# EAGLE board magspoof (EAGLE 6.3)
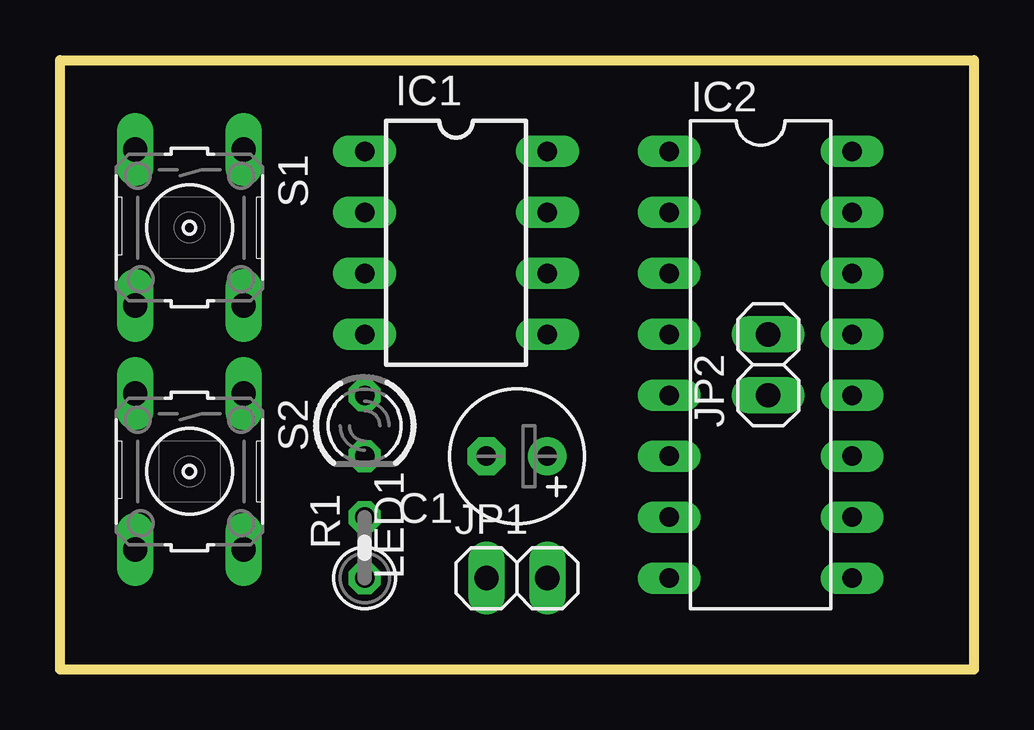
[diagram p0: board, top side]
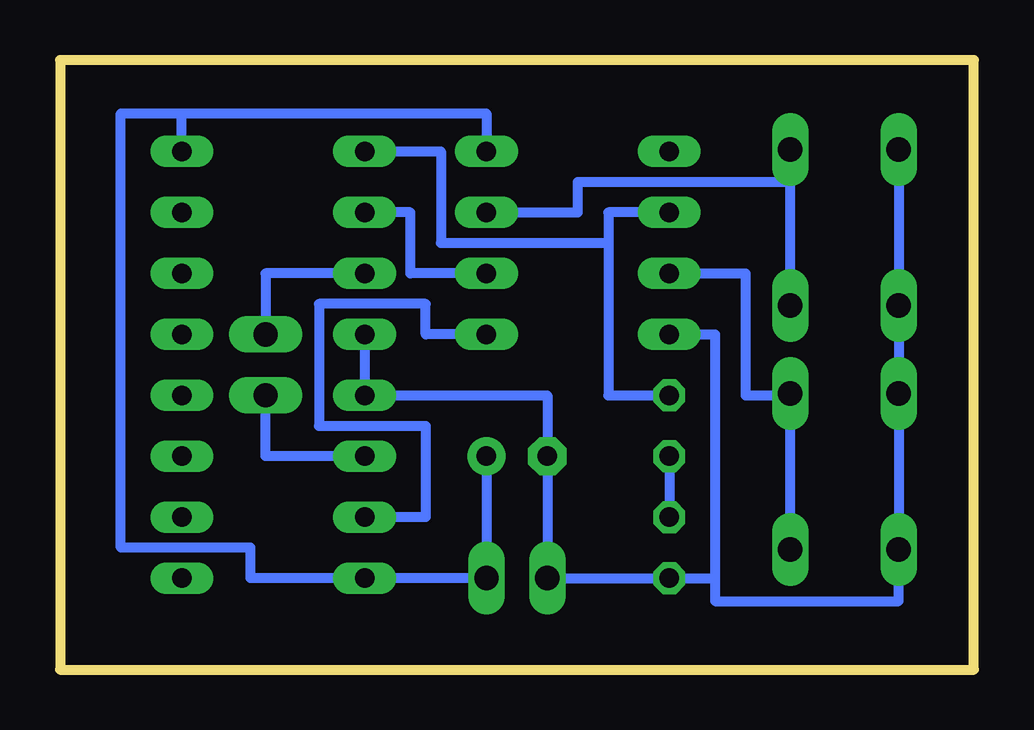
[diagram p1: board, bottom side, seen from below]

Size 38.1 x 25.4 mm. Coordinates in mm from the lower left corner, seen from the top.
Outline: 0,25.4 38.1,25.4 38.1,0 0,0 0,25.4
Copper layers (1*16): Top 0.035mm / dielectric 1.5mm / Bottom 0.035mm
Design rules "default": minimum track width 10mil, minimum drill 24mil, track to track 8mil, track to pad 8mil, pad to pad 8mil, via to via 8mil, smd to smd 8mil, copper to edge 40mil, drill to drill 8mil, minimum pad ring 10mil, minimum via ring 8mil, stop-mask expansion 4mil, vias tented up to drill 0mil, thermal gap 10mil

## Footprints (pad centres in the part's own frame; a part is rotated, then mirrored left to right if it is on the bottom)
E2,5-6 = drill 0.813 pad 1.6: + -1.27,0 | drill 0.813 pad 1.6 octagon: - 1.27,0
DIL08 = drill 0.813 long: 1 -3.81,-3.81; 2 -1.27,-3.81; 3 1.27,-3.81; 4 3.81,-3.81; 5 3.81,3.81; 6 1.27,3.81; 7 -1.27,3.81; 8 -3.81,3.81
DIL16 = drill 0.813 long: 1 -8.89,-3.81; 2 -6.35,-3.81; 3 -3.81,-3.81; 4 -1.27,-3.81; 5 1.27,-3.81; 6 3.81,-3.81; 7 6.35,-3.81; 8 8.89,-3.81; 9 8.89,3.81; 10 6.35,3.81; 11 3.81,3.81; 12 1.27,3.81; 13 -1.27,3.81; 14 -3.81,3.81; 15 -6.35,3.81; 16 -8.89,3.81
1X02 = drill 1.016 long: 1 -1.27,0; 2 1.27,0
LED3MM = drill 0.813 octagon: A -1.27,0; K 1.27,0
0207/2V = drill 0.813 octagon: 1 -1.27,0; 2 1.27,0
B3F-10XX = drill 1.016 long: 1 -3.251,2.261; 2 3.251,2.261; 3 -3.251,-2.261; 4 3.251,-2.261

## Placement (x,y rotation side)
C1  100uF  [E2,5-6]  19.05,8.89 180 top
IC1  ATTINY85  [DIL08]  16.51,17.78 270 top
IC2  L293D  [DIL16]  29.21,12.7 270 top
JP1  Power  [1X02]  19.05,3.81 0 top
JP2  Coil  [1X02]  29.53,12.7 90 top
LED1  [LED3MM]  12.7,10.16 270 top
R1  1k  [0207/2V]  12.7,5.08 90 top
S1  Card  [B3F-10XX]  5.4,18.41 270 top
S2  Service  [B3F-10XX]  5.4,8.26 270 top

## Library data of the parts
C1 = rcl
IC1 = atmel
IC2 = st-microelectronics; MPN: L293D; OC_FARNELL: 9589619; OC_NEWARK: 56P8249
JP1 JP2 = pinhead
LED1 = led
R1 = resistor
S1 S2 = switch-omron; MPN: B3F-1000; OC_FARNELL: 176432; OC_NEWARK: 36M3542

## Nets
GND3: IC2.13
GND4: IC2.12
N$1: C1.- IC1.4 IC2.4 IC2.5 JP1.1 R1.1 S1.3 S1.4 S2.3 S2.4
N$2: C1.+ IC1.8 IC2.8 IC2.16 JP1.2
N$3: IC1.3 S2.1 S2.2
N$4: IC2.3 JP2.2
N$5: IC2.6 JP2.1
N$6: IC1.5 IC2.7
N$7: IC1.6 IC2.2
N$8: IC1.2 IC2.1 LED1.A
N$13: IC1.7 S1.1 S1.2
N$17: LED1.K R1.2

## Tracks (layer width: path | path; a pad name or v marks a point on that pad's centre or on a via)
N$1
  Bottom 0.406: IC2.4 IC2.5 17.78,11.43 C1.- JP1.1 R1.1 10.79,3.81 | S1.3 S1.4 S2.3 S2.4 3.14,2.86 10.79,2.86 10.79,3.81 | IC1.4 10.79,13.97 10.79,3.81
N$2
  Bottom 0.406: IC2.16 33.02,23.18 | 33.02,23.18 20.32,23.18 IC1.8 | C1.+ JP1.2 IC2.8 30.16,3.81 30.16,5.08 35.56,5.08 35.56,23.18 33.02,23.18
N$3
  Bottom 0.406: IC1.3 9.53,16.51 9.53,11.43 7.66,11.43 S2.1 S2.2
N$4
  Bottom 0.406: IC2.3 29.53,16.51 JP2.2
N$5
  Bottom 0.406: IC2.6 29.53,8.89 JP2.1
N$6
  Bottom 0.406: IC1.5 22.86,13.97 22.86,15.24 27.3,15.24 27.3,10.16 22.86,10.16 22.86,6.35 IC2.7
N$7
  Bottom 0.406: IC1.6 23.5,16.51 23.5,19.05 IC2.2
N$8
  Bottom 0.406: IC1.2 15.24,19.05 15.24,17.78 | 15.24,17.78 15.24,11.43 LED1.A | IC2.1 22.23,21.59 22.23,17.78 15.24,17.78
N$13
  Bottom 0.406: S1.2 7.66,20.32 | 7.66,20.32 S1.1 | IC1.7 16.51,19.05 16.51,20.32 7.66,20.32
N$17
  Bottom 0.406: LED1.K R1.2